# EAGLE board PCB v17 (EAGLE 9.7.0)
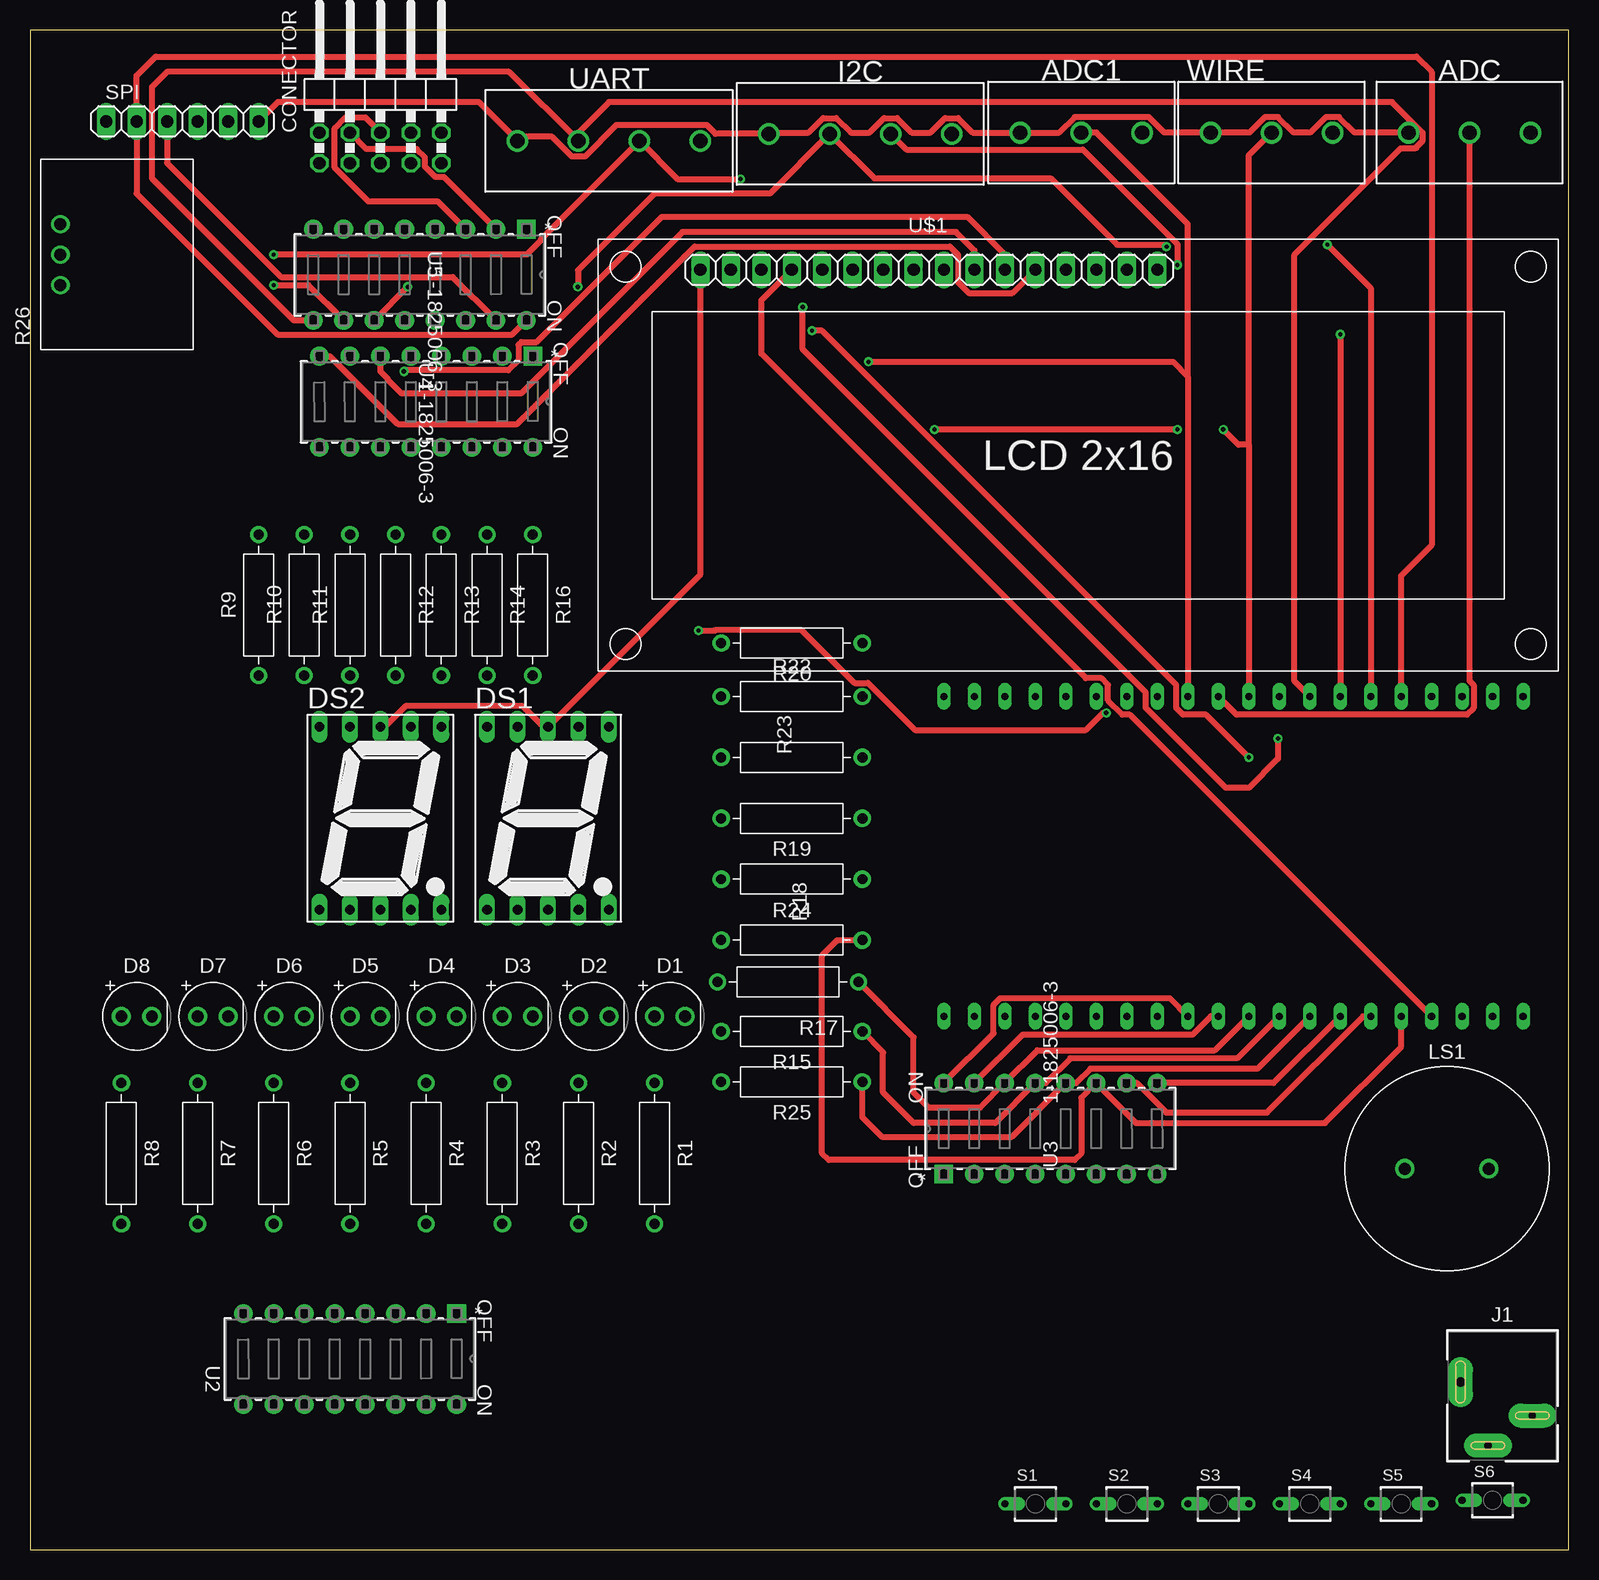
[diagram p0: board, top side]
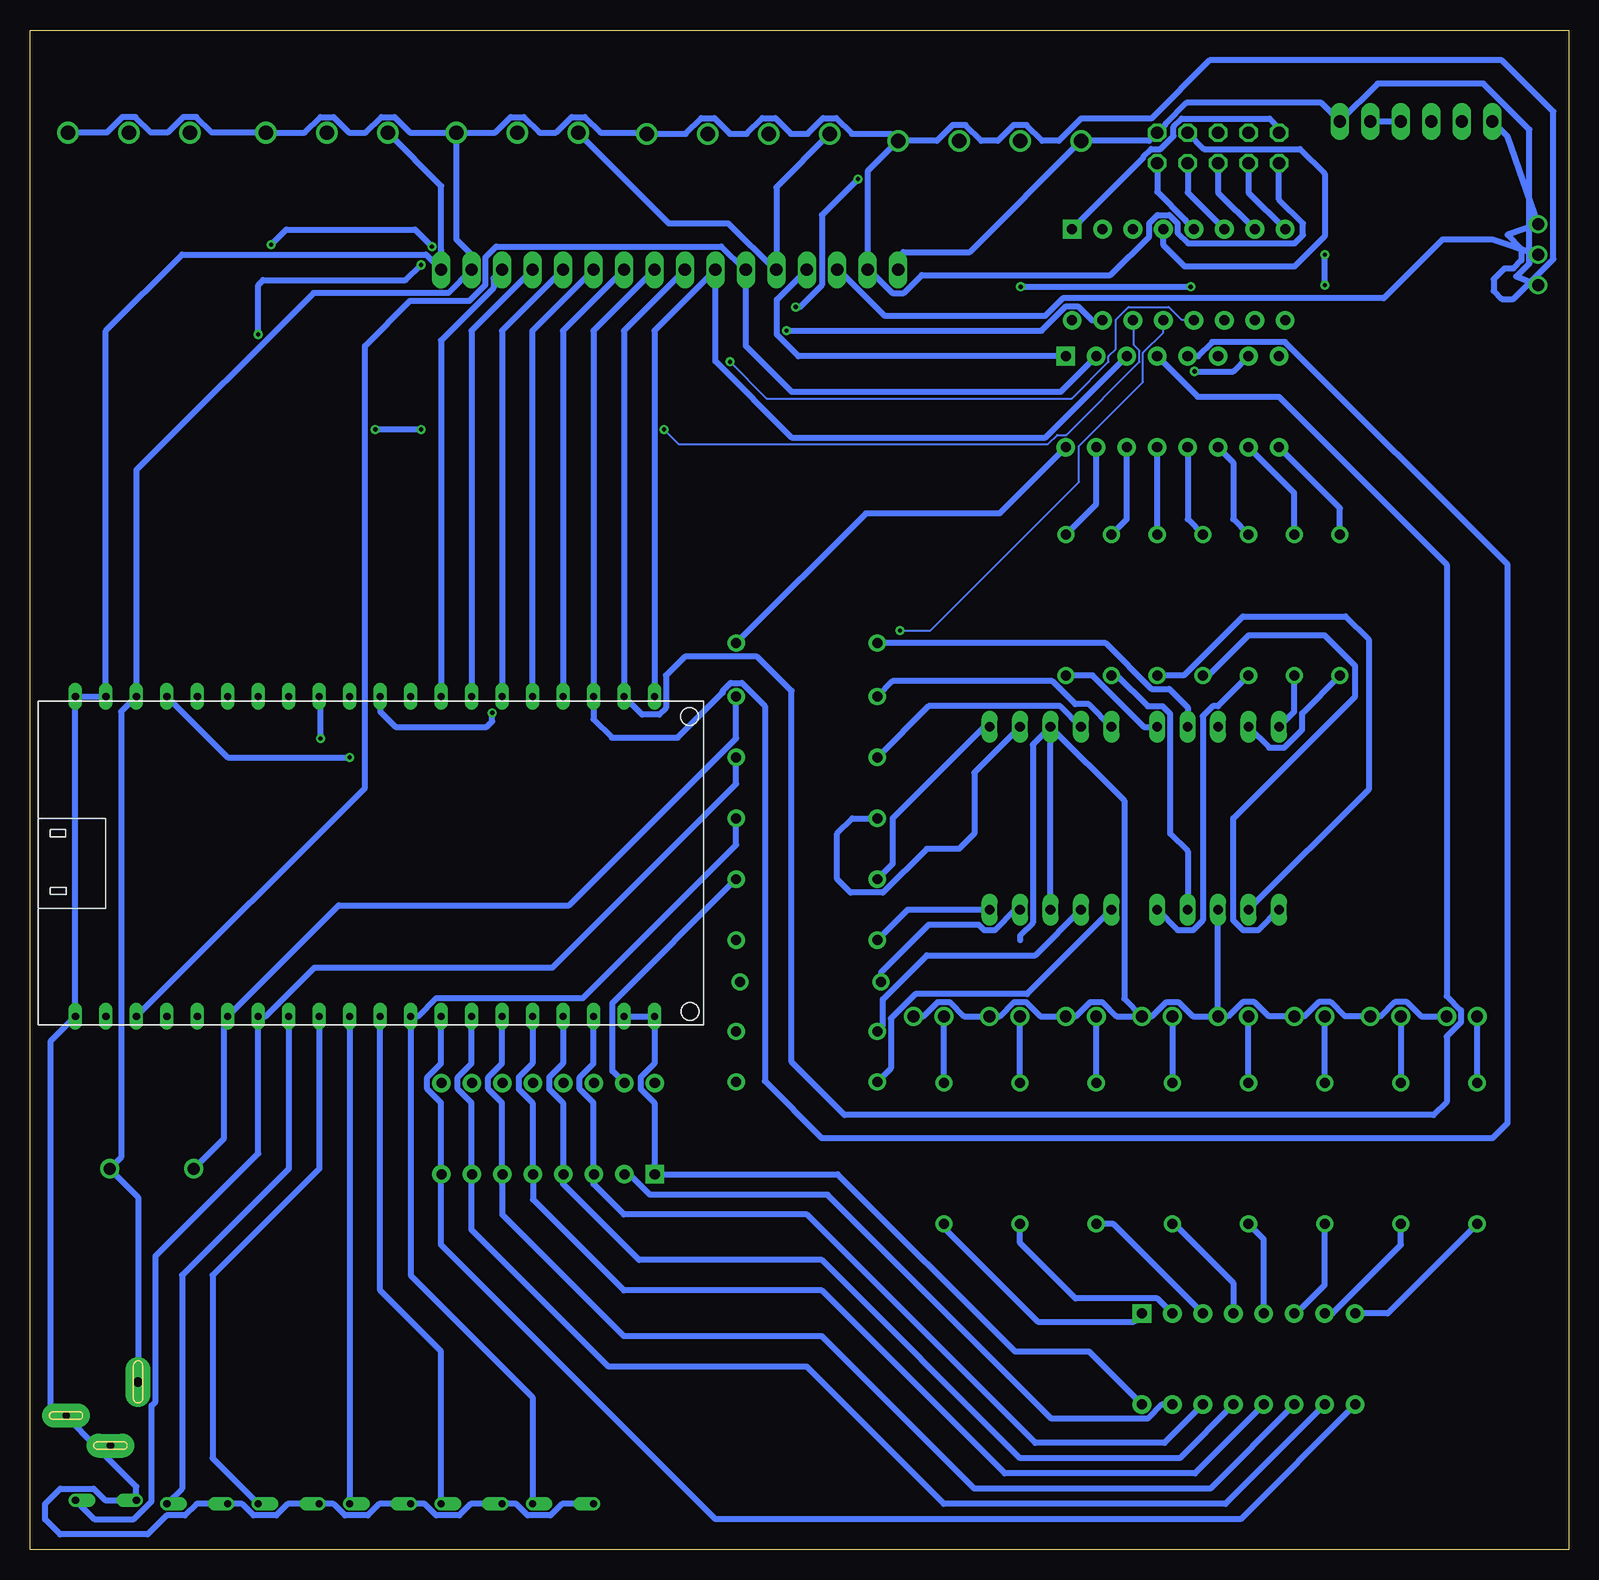
[diagram p1: board, bottom side, seen from below]

Size 128.25 x 126.67 mm. Coordinates in mm from the lower left corner, seen from the top.
Outline: 120.43,8.37 120.41,8.37 120.38,8.38 120.36,8.38 120.33,8.39 120.31,8.4 120.28,8.41 120.26,8.42 120.24,8.44 120.22,8.46 120.2,8.48 120.19,8.5 120.17,8.52 120.16,8.54 120.15,8.57 120.14,8.59 120.14,8.62 120.13,8.64 120.13,8.67 120.13,8.7 120.14,8.72 120.14,8.75 120.15,8.77 120.16,8.8 120.17,8.82 120.19,8.84 120.2,8.86 120.22,8.88 120.24,8.9 120.26,8.92 120.28,8.93 120.31,8.94 120.33,8.95 120.36,8.96 120.38,8.96 120.41,8.97 120.43,8.97 122.63,8.97 122.66,8.97 122.69,8.96 122.71,8.96 122.74,8.95 122.76,8.94 122.78,8.93 122.81,8.92 122.83,8.9 122.85,8.88 122.86,8.86 122.88,8.84 122.89,8.82 122.91,8.8 122.92,8.77 122.92,8.75 122.93,8.72 122.93,8.7 122.93,8.67 122.93,8.64 122.93,8.62 122.92,8.59 122.92,8.57 122.91,8.54 122.89,8.52 122.88,8.5 122.86,8.48 122.85,8.46 122.83,8.44 122.81,8.42 122.78,8.41 122.76,8.4 122.74,8.39 122.71,8.38 122.69,8.38 122.66,8.37 122.63,8.37 120.43,8.37
Outline: 118.83,12.62 118.83,15.32 118.84,15.36 118.84,15.39 118.85,15.42 118.86,15.46 118.87,15.49 118.89,15.52 118.91,15.55 118.93,15.58 118.95,15.6 118.98,15.63 119,15.65 119.03,15.67 119.06,15.68 119.1,15.7 119.13,15.71 119.16,15.71 119.2,15.72 119.23,15.72 119.27,15.72 119.3,15.71 119.34,15.71 119.37,15.7 119.4,15.68 119.43,15.67 119.46,15.65 119.49,15.63 119.52,15.6 119.54,15.58 119.56,15.55 119.58,15.52 119.6,15.49 119.61,15.46 119.62,15.42 119.63,15.39 119.63,15.36 119.63,15.32 119.63,12.62 119.63,12.59 119.63,12.55 119.62,12.52 119.61,12.48 119.6,12.45 119.58,12.42 119.56,12.39 119.54,12.36 119.52,12.34 119.49,12.31 119.46,12.29 119.43,12.27 119.4,12.26 119.37,12.24 119.34,12.23 119.3,12.23 119.27,12.22 119.23,12.22 119.2,12.22 119.16,12.23 119.13,12.23 119.1,12.24 119.06,12.26 119.03,12.27 119,12.29 118.98,12.31 118.95,12.34 118.93,12.36 118.91,12.39 118.89,12.42 118.87,12.45 118.86,12.48 118.85,12.52 118.84,12.55 118.84,12.59 118.83,12.62
Outline: 124.13,10.87 124.11,10.87 124.08,10.88 124.06,10.88 124.03,10.89 124.01,10.9 123.98,10.91 123.96,10.92 123.94,10.94 123.92,10.96 123.9,10.98 123.89,11 123.87,11.02 123.86,11.04 123.85,11.07 123.84,11.09 123.84,11.12 123.83,11.14 123.83,11.17 123.83,11.2 123.84,11.22 123.84,11.25 123.85,11.27 123.86,11.3 123.87,11.32 123.89,11.34 123.9,11.36 123.92,11.38 123.94,11.4 123.96,11.42 123.98,11.43 124.01,11.44 124.03,11.45 124.06,11.46 124.08,11.46 124.11,11.47 124.13,11.47 126.33,11.47 126.36,11.47 126.39,11.46 126.41,11.46 126.44,11.45 126.46,11.44 126.48,11.43 126.51,11.42 126.53,11.4 126.55,11.38 126.56,11.36 126.58,11.34 126.59,11.32 126.61,11.3 126.62,11.27 126.62,11.25 126.63,11.22 126.63,11.2 126.63,11.17 126.63,11.14 126.63,11.12 126.62,11.09 126.62,11.07 126.61,11.04 126.59,11.02 126.58,11 126.56,10.98 126.55,10.96 126.53,10.94 126.51,10.92 126.48,10.91 126.46,10.9 126.44,10.89 126.41,10.88 126.39,10.88 126.36,10.87 126.33,10.87 124.13,10.87
Outline: 0,126.67 0,0 128.25,0 128.25,126.67 0,126.67
Copper layers (1*16): Top / Bottom
Stack-up Default Layer Stack: Top User Defined 0.035mm / Dielectric-1 User Defined 1.5mm / Bottom User Defined 0.035mm
Design rules "default": minimum track width 6mil, minimum drill 0.35mm, track to track 6mil, track to pad 6mil, pad to pad 6mil, via to via 6mil, smd to smd 6mil, copper to edge 40mil, drill to drill 6mil, minimum pad ring 10mil, minimum via ring 8mil, stop-mask expansion 4mil, vias tented up to drill 0mil, thermal gap 10mil

## Footprints (pad centres in the part's own frame; a part is rotated, then mirrored left to right if it is on the bottom)
TERMBLK_508-3N = drill 1.2: 1 0,0; 2 5.08,0; 3 10.16,0
2X05/90 = drill 1.016 octagon: 1 -5.08,-6.35; 2 -5.08,-3.81; 3 -2.54,-6.35; 4 -2.54,-3.81; 5 0,-6.35; 6 0,-3.81; 7 2.54,-6.35; 8 2.54,-3.81; 9 5.08,-6.35; 10 5.08,-3.81
LEDRD254W60D565H860B_G = drill 0.981 pad 1.581: 1 -1.27,0; 2 1.27,0
7SEG-13 = drill 0.813 long: 1 -5.08,-7.62; 2 -2.54,-7.62; 3 0,-7.62; 4 2.54,-7.62; 5 5.08,-7.62; 6 5.08,7.62; 7 2.54,7.62; 8 0,7.62; 9 -2.54,7.62; 10 -5.08,7.62
TERMBLK_508-4N = drill 1.2: 1 0,0; 2 5.08,0; 3 10.16,0; 4 15.24,0
694106402002 = drill 0.8 pad 2.1 long: 1 -3.5,0 | drill 0.6 pad 2 long: 2 -1.2,-5.3; 3 2.5,-2.8
PIEZO = drill 1 pad 1.6: 1 -3.5,0; 2 3.5,0
RESAD1176W63L850D250B = drill 0.83 pad 1.43: 1 -5.88,0; 2 5.88,0
91A1A-B28-B15L-ND = drill 1: 1 2.54,0; 2 0,0; 3 -2.54,0
SWITCH-OMRON_B3U-1000P = drill 0.6 offset: P$1 -2.54,0; P$3 2.54,0
1X06 = drill 1.016 long: 1 -6.35,0; 2 -3.81,0; 3 -1.27,0; 4 1.27,0; 5 3.81,0; 6 6.35,0
FRANZININHO = drill 0.6 long: 1 2.54,52.07; 2 2.54,49.53; 3 2.54,46.99; 4 2.54,44.45; 5 2.54,41.91; 6 2.54,39.37; 7 2.54,36.83; 8 2.54,34.29; 9 2.54,31.75; 10 2.54,29.21; 11 2.54,26.67; 12 2.54,24.13; 13 2.54,21.59; 14 2.54,19.05; 15 2.54,16.51; 16 2.54,13.97; 17 2.54,11.43; 18 2.54,8.89; 19 2.54,6.35; 20 2.54,3.81; 21 29.21,52.07; 22 29.21,49.53; 23 29.21,46.99; 24 29.21,44.45; 25 29.21,41.91; 26 29.21,39.37; 27 29.21,36.83; 28 29.21,34.29; 29 29.21,31.75; 30 29.21,29.21; 31 29.21,26.67; 32 29.21,24.13; 33 29.21,21.59; 34 29.21,19.05; 35 29.21,16.51; 36 29.21,13.97; 37 29.21,11.43; 38 29.21,8.89; 39 29.21,6.35; 40 29.21,3.81
SWDIP16_299X110P100 = drill 0.838 pad 1.549 square: 1 -7.595,17.78 | drill 0.838 pad 1.549: 2 -7.595,15.24; 3 -7.595,12.7; 4 -7.595,10.16; 5 -7.595,7.62; 6 -7.595,5.08; 7 -7.595,2.54; 8 -7.595,0; 9 0,0; 10 0,2.54; 11 0,5.08; 12 0,7.62; 13 0,10.16; 14 0,12.7; 15 0,15.24; 16 0,17.78
JHD-162A = drill 1.016 long: 1 -19.05,0; 2 -16.51,0; 3 -13.97,0; 4 -11.43,0; 5 -8.89,0; 6 -6.35,0; 7 -3.81,0; 8 -1.27,0; 9 1.27,0; 10 3.81,0; 11 6.35,0; 12 8.89,0; 13 11.43,0; 14 13.97,0; 15 16.51,0; 16 19.05,0

## Placement (x,y rotation side)
ADC  2828XX-3282837-3  [TERMBLK_508-3N]  125.08,118.11 180 top
ADC1  2828XX-3282837-3  [TERMBLK_508-3N]  92.71,118.11 180 top
CONECTOR  PINHD-2X5/90  [2X05/90]  29.21,121.92 0 top
D1  [LEDRD254W60D565H860B_G]  53.34,44.45 0 top
D2  [LEDRD254W60D565H860B_G]  46.99,44.45 0 top
D3  [LEDRD254W60D565H860B_G]  40.64,44.45 0 top
D4  [LEDRD254W60D565H860B_G]  34.29,44.45 0 top
D5  [LEDRD254W60D565H860B_G]  27.94,44.45 0 top
D6  [LEDRD254W60D565H860B_G]  21.59,44.45 0 top
D7  [LEDRD254W60D565H860B_G]  15.24,44.45 0 top
D8  [LEDRD254W60D565H860B_G]  8.89,44.45 0 top
DS1  7SEG-CA  [7SEG-13]  43.18,60.96 0 top
DS2  7SEG-CA  [7SEG-13]  29.21,60.96 0 top
I2C  2828XX-4282837-4  [TERMBLK_508-4N]  76.82,118.02 180 top
J1  [694106402002]  122.73,13.97 0 top
LS1  PIEZO  [PIEZO]  118.11,31.75 0 top
R1  1k  [RESAD1176W63L850D250B]  52.07,33.02 270 top
R2  1k  [RESAD1176W63L850D250B]  45.72,33.02 270 top
R3  1k  [RESAD1176W63L850D250B]  39.37,33.02 270 top
R4  1k  [RESAD1176W63L850D250B]  33.02,33.02 270 top
R5  1k  [RESAD1176W63L850D250B]  26.67,33.02 270 top
R6  1k  [RESAD1176W63L850D250B]  20.32,33.02 270 top
R7  1k  [RESAD1176W63L850D250B]  13.97,33.02 270 top
R8  1k  [RESAD1176W63L850D250B]  7.62,33.02 270 top
R9  20  [RESAD1176W63L850D250B]  19.05,78.74 90 top
R10  20  [RESAD1176W63L850D250B]  22.86,78.74 90 top
R11  20  [RESAD1176W63L850D250B]  26.67,78.74 90 top
R12  20  [RESAD1176W63L850D250B]  30.48,78.74 270 top
R13  20  [RESAD1176W63L850D250B]  34.29,78.74 270 top
R14  20  [RESAD1176W63L850D250B]  38.1,78.74 270 top
R15  20  [RESAD1176W63L850D250B]  63.5,43.18 180 top
R16  20  [RESAD1176W63L850D250B]  41.91,78.74 270 top
R17  20  [RESAD1176W63L850D250B]  63.18,47.31 180 top
R18  20  [RESAD1176W63L850D250B]  63.5,55.88 180 top
R19  20  [RESAD1176W63L850D250B]  63.5,60.96 180 top
R20  20  [RESAD1176W63L850D250B]  63.5,75.56 180 top
R22  20  [RESAD1176W63L850D250B]  63.5,71.12 0 top
R23  20  [RESAD1176W63L850D250B]  63.5,66.04 0 top
R24  20  [RESAD1176W63L850D250B]  63.5,50.8 0 top
R25  20  [RESAD1176W63L850D250B]  63.5,38.98 180 top
R26  91A1A-B28-B15L  [91A1A-B28-B15L-ND]  2.54,107.95 90 top
S1  SWITCH-OMRON_B3U-1000P  [SWITCH-OMRON_B3U-1000P]  83.82,3.81 0 top
S2  SWITCH-OMRON_B3U-1000P  [SWITCH-OMRON_B3U-1000P]  91.44,3.81 0 top
S3  SWITCH-OMRON_B3U-1000P  [SWITCH-OMRON_B3U-1000P]  99.06,3.81 0 top
S4  SWITCH-OMRON_B3U-1000P  [SWITCH-OMRON_B3U-1000P]  106.68,3.81 0 top
S5  SWITCH-OMRON_B3U-1000P  [SWITCH-OMRON_B3U-1000P]  114.3,3.81 0 top
S6  SWITCH-OMRON_B3U-1000P  [SWITCH-OMRON_B3U-1000P]  121.92,4.11 0 top
SPI  PINHD-1X06_1X06M  [1X06]  12.7,119.05 0 top
U1  FRANZININHO  [FRANZININHO]  128.27,41.91 90 top
U2  1-1825006-3  [SWDIP16_299X110P100]  17.78,12.09 270 top
U3  1-1825006-3  [SWDIP16_299X110P100]  93.95,38.89 90 top
U4  1-1825006-3  [SWDIP16_299X110P100]  24.13,91.88 270 top
U5  1-1825006-3  [SWDIP16_299X110P100]  23.61,102.47 270 top
U$1  LCD-16X2JHD-162A  [JHD-162A]  74.93,106.68 0 top
UART  2828XX-4282837-4  [TERMBLK_508-4N]  55.88,117.43 180 top
WIRE  2828XX-3282837-3  [TERMBLK_508-3N]  108.57,118.11 180 top

## Library data of the parts
ADC ADC1 WIRE = Connector; CATEGORY: Connector; DESCRIPTION: TERM BLK 3P SIDE ENT 5.08mm PCB; MANUFACTURER: TE Connectivity; MPN: 282837-3; OPERATING_TEMPERATURE: -40°C to +105°C; PART_STATUS: Active; ROHS_COMPLIANCE: RoHS Compliant; SERIES: 282837; SUBCATEGORY: Terminal Block; TYPE: Side Wire Entry
CONECTOR = Connector; CATEGORY: CONNECTOR; SUB-CATEGORY: PIN-HEADER
D1-D8 = Library
DS1 DS2 = Opto-Electronic; CATEGORY: Opto-Electronic; SUB-CATEGORY: Display; TYPE: 7-Segment
I2C UART = Connector; CATEGORY: Connector; DESCRIPTION: TERM BLK 4P SIDE ENT 5.08mm PCB; MANUFACTURER: TE Connectivity; MPN: 282837-4; OPERATING_TEMPERATURE: 40°C to +105°C; PART_STATUS: Active; ROHS_COMPLIANCE: RoHS Compliant; SERIES: 283737; SUBCATEGORY: Terminal Block; TYPE: Side Wire Entry
J1 = Connector; CATEGORY: Connector; DESCRIPTION: DC POWER JACK - VERTICAL - THT - 2.0 & 2.5Ø - WR-DC; MANUFACTURER: Würth Elektronik; MPN: 694106402002; OPERATING_TEMPERATURE: -40°C to +85°C; PART_STATUS: Active; ROHS_COMPLIANCE: RoHS Compliant; SERIES: WR-DC; SUBCATEGORY: Power Connector; TYPE: Vertical
LS1 SPI U$1 = Tinkercad
R1-R20 R22-R25 = Resistor; CATEGORY: Resistor; SUB-CATEGORY: Fixed
R26 = Potentiometer_Trimmers; CREATED_BY: PCBLayout.com; DIGIKEY_PARTNO: 91A1A-B28-B15L-ND; MANUFACTURER: Bourns Inc.; MPN: 91A1A-B28-B15L
S1-S6 = 52101-101-REV-A_v16
U1 = LIB Franzininho; PROD_ID: IC-13338
U2-U5 = Switches; BUILT_BY: EMA_UL_Team; CATEGORY: DIP & SIP Switches; COPYRIGHT: Copyright (C) 2016 Accelerated Designs. All rights reserved; DESCRIPTION: GDS0804=DIP SW,SLIDE,THRU/HL; MANUFACTURER_PART_NUMBER: 1-1825006-3; PART_STATUS: active; SERIES: Alcoswitch DIP,Alcoswitch DIP GDS; VENDOR: TE Connectivity

## Nets
3V3: U1.19
+5V: ADC1.1 ADC.1 CONECTOR.1 I2C.1 J1.1 LS1.2 R26.1 SPI.1 U1.38 U$1.2 U$1.15 UART.1 WIRE.1
GND: ADC1.3 ADC.3 CONECTOR.10 D1.2 D2.2 D3.2 D4.2 D5.2 D6.2 D7.2 D8.2 DS1.3 DS1.8 DS2.3 DS2.8 I2C.4 J1.2 J1.3 R26.3 S1.P$1 S2.P$1 S3.P$1 S4.P$1 S5.P$1 S6.P$1 SPI.6 U1.20 U1.39 U1.40 U$1.1 U$1.5 U$1.16 UART.4 WIRE.3
GPIO: SPI.4 SPI.5
GPIO0: U1.1 U1.2 U2.16 U3.1
GPIO1: U2.15 U3.2
GPIO2: U1.3 U2.14 U3.3
GPIO3: U1.4 U2.13 U3.4
GPIO4: U1.5 U2.12 U3.5
GPIO5: U1.6 U2.11 U3.6
GPIO6: U1.7 U2.10 U3.7
GPIO7: U1.8 U2.9 U3.8
GPIO8: U1.17 U4.1 U$1.4
GPIO9: U1.18 U4.2 U$1.6
GPIO10: R19.1 S1.P$3 U1.9 U3.16
GPIO11: R18.1 S2.P$3 U1.10 U3.15
GPIO12: R17.1 S3.P$3 U1.11 U3.14
GPIO13: R15.1 S4.P$3 U1.12 U3.13
GPIO14: R25.1 S5.P$3 U1.13 U3.12
GPIO15: R23.2 S6.P$3 U1.14 U3.9
GPIO16: LS1.1 R22.2 U1.15 U3.10
GPIO17: R24.2 U1.16 U3.11
GPIO18: SPI.3 U1.37 U5.15
GPIO21: SPI.2 U1.36 U5.16
GPIO26: I2C.3 U1.35 U5.11
GPIO33: I2C.2 U1.34
GPIO34: U1.33 U5.9 UART.3
GPIO35: U1.32 U5.10 UART.2
GPIO36: U1.31 U5.14 WIRE.2
GPIO37: ADC.2 U1.30 U5.13
GPIO38: ADC1.2 U1.29 U5.12
GPIO39: U1.28 U$1.14
GPIO40: U1.27 U$1.13
GPIO41: U1.26 U4.8 U$1.12
GPIO42: U1.25 U4.7 U$1.11
GPIO43: U1.24 U4.6 U$1.10
GPIO44: U1.23 U4.5 U$1.9
GPIO45: U1.22 U4.4 U$1.8
GPIO46: U1.21 U4.3 U$1.7
N$1: D1.1 R1.1
N$2: D2.1 R2.1
N$3: D3.1 R3.1
N$4: D4.1 R4.1
N$5: D5.1 R5.1
N$6: D6.1 R6.1
N$7: D7.1 R7.1
N$8: D8.1 R8.1
N$9: DS2.7 R20.2
N$10: DS2.6 R16.2
N$11: DS2.4 R14.2
N$12: DS2.2 R13.2
N$13: DS2.1 R12.2
N$14: DS2.9 R9.1
N$15: DS2.10 R10.1
N$16: DS1.1 R25.2
N$17: DS1.2 R15.2
N$18: DS1.4 R17.2
N$19: DS1.6 R18.2
N$20: DS1.7 R19.2
N$21: DS1.10 R22.1
N$22: DS1.9 R23.1
N$23: DS1.5 R24.1
N$24: R26.2 U$1.3
N$25: R1.2 U2.1
N$26: R5.2 U2.5
N$27: R6.2 U2.6
N$28: R7.2 U2.7
N$29: R8.2 U2.8
N$30: R4.2 U2.4
N$31: R3.2 U2.3
N$32: R2.2 U2.2
N$33: DS2.5 R11.1
N$34: R20.1 U4.16
N$35: R16.1 U4.15
N$36: R14.1 U4.14
N$37: R13.1 U4.13
N$38: R12.1 U4.12
N$39: R11.2 U4.11
N$40: R10.2 U4.10
N$41: R9.2 U4.9
N$49: CONECTOR.3 U5.8
N$50: CONECTOR.5 U5.7
N$51: CONECTOR.7 U5.6
N$52: CONECTOR.9 U5.5
N$53: CONECTOR.2 U5.1
N$54: CONECTOR.4 U5.2
N$55: CONECTOR.6 U5.3
N$56: CONECTOR.8 U5.4

## Tracks (layer width: path | path; a pad name or v marks a point on that pad's centre or on a via)
+5V
  Bottom 0.508: J1.1 119.23,29.37 LS1.2 120.65,32.71 120.65,69.85 U1.38 119.38,89.99 104.62,104.75 93.37,104.75 U$1.15 91.44,107.95 92.71,109.22 ADC1.1 | SPI.1 5.08,117.78 R26.1 5.08,109.59 3.92,108.43 3.92,107.47 4.6,106.79 5.34,106.79 6.24,105.89 6.24,104.93 5.56,104.25 4.6,104.25 1.27,107.58 1.27,119.86 5.54,124.13 29.92,124.13 34.77,119.28 40.64,119.28 42.49,117.43 43.87,117.43 45.18,118.73 46.26,118.73 47.57,117.43 48.95,117.43 50.26,118.73 51.34,118.73 52.65,117.43 UART.1 | ADC.1 121.85,118.11 120.54,119.42 119.46,119.42 118.16,118.11 116.77,118.11 115.47,119.42 114.38,119.42 113.08,118.11 WIRE.1 105.34,118.11 104.03,119.42 102.95,119.42 101.65,118.11 100.26,118.11 98.95,119.42 97.87,119.42 96.57,118.11 ADC1.1 | ADC1.1 89.48,118.11 88.17,119.42 87.09,119.42 85.78,118.11 84.4,118.11 83.09,119.42 82.01,119.42 80.7,118.11 76.92,118.11 I2C.1 73.59,118.02 72.28,119.32 71.2,119.32 69.9,118.02 68.51,118.02 67.2,119.32 66.12,119.32 64.82,118.02 63.43,118.02 62.12,119.32 61.04,119.32 59.74,118.02 56.47,118.02 UART.1 | UART.1 58.42,114.89 U$1.2 58.29,106.68 56.36,104.75 55.4,104.75 53.91,106.24 38.17,106.24 34.95,109.46 34.95,110.55 34.26,111.24 33.28,111.24 32.59,110.55 32.59,109.75 31.72,108.88 22.83,108.88 22.14,109.57 22.14,110.55 24.13,112.55 CONECTOR.1
GND
  Top 0.508: DS2.8 29.58,68.58 31.31,70.31 41.08,70.31 42.81,68.58 DS1.8 55.88,81.28 U$1.1 | UART.4 40.3,117.77 | 40.3,117.77 37.42,120.65 20.65,120.65 SPI.6 | ADC.3 110.42,118.11 109.11,119.42 108.03,119.42 106.73,118.11 105.34,118.11 104.03,119.42 102.95,119.42 101.65,118.11 WIRE.3 94.56,118.11 93.25,119.42 87.09,119.42 85.78,118.11 ADC1.3 78.58,118.11 77.37,119.32 76.28,119.32 75.07,118.11 73.5,118.11 72.28,119.32 71.2,119.32 69.99,118.11 68.42,118.11 67.2,119.32 66.12,119.32 64.91,118.11 61.68,118.11 I2C.4 57.14,118.02 56.42,118.73 48.87,118.73 46.26,116.12 45.18,116.12 43.53,117.77 40.3,117.77
  Bottom 0.152: 125.14,11 125.22,10.92 J1.3
  Bottom 0.508: D4.2 34.71,44.45 33.52,45.65 32.52,45.65 31.33,44.45 D5.2 | D5.2 28.36,44.45 27.17,45.65 26.17,45.65 24.98,44.45 D6.2 22.01,44.45 20.82,45.65 19.82,45.65 18.63,44.45 D7.2 15.66,44.45 14.47,45.65 13.47,45.65 12.28,44.45 D8.2 | D1.2 53.76,44.45 52.57,45.65 51.57,45.65 50.38,44.45 D2.2 47.41,44.45 46.22,45.65 45.22,45.65 44.03,44.45 D3.2 41.06,44.45 39.87,45.65 38.87,45.65 37.68,44.45 D4.2 | 122.8,8.67 125.14,11 125.3,11.17 | J1.3 126.5,11.17 126.5,42.41 U1.20 U1.40 U1.39 121.92,101.6 115.57,107.95 95.25,107.95 U$1.16 93.98,108.27 93.96,108.29 93.96,113.66 WIRE.3 | D5.2 DS2.3 | I2C.4 66.04,113.56 U$1.5 66.17,106.68 70.03,110.54 74.98,110.54 ADC1.3 | J1.2 122.8,8.67 | 122.8,8.67 119.38,5.25 S6.P$1 121.99,4.11 122.95,5.07 125.72,5.07 126.98,3.81 126.98,2.52 125.73,1.27 118.45,1.27 116.87,2.85 115.33,2.85 114.37,3.81 S5.P$1 110.58,3.81 109.62,2.85 107.71,2.85 106.75,3.81 S4.P$1 102.96,3.81 102,2.85 100.09,2.85 99.13,3.81 S3.P$1 95.34,3.81 94.38,2.85 92.47,2.85 91.51,3.81 S2.P$1 87.72,3.81 86.76,2.85 84.85,2.85 83.89,3.81 S1.P$1 | D4.2 37.03,45.92 37.03,62.43 DS1.8 | R26.3 4.36,106.13 4.33,106.13 3.26,107.2 3.26,118.37 7.08,122.2 15.9,122.2 SPI.6 20.6,120.6 31.85,120.6 33.58,118.87 33.58,118.82 CONECTOR.10 34.97,117.43 UART.4 49.9,108.17 55.45,108.17 55.88,107.74 U$1.1 | 45.72,50.8 45.72,51.17 44.65,52.24 44.65,67.11 DS1.8 | DS1.3 DS1.8
GPIO
  Bottom 0.508: SPI.5 SPI.4
GPIO0
  Bottom 0.508: U1.2 U1.1 76.2,40.52 77.35,39.38 77.35,38.4 76.2,37.25 76.2,31.33 U3.1 60.92,31.29 46.14,16.51 39.98,16.51 U2.16
GPIO1
  Bottom 0.508: U2.15 33.89,12.09 35.07,10.91 43.09,10.91 61.75,29.58 76.58,29.58 78.29,31.29 U3.2
GPIO2
  Bottom 0.508: U2.14 33.68,8.89 44.45,8.89 63.5,27.94 78.74,27.94 81.28,30.48 81.28,31.26 | 81.28,31.26 U3.3 | U1.3 81.28,40.52 82.43,39.38 82.43,38.4 81.28,37.25 81.28,31.26
GPIO3
  Bottom 0.508: U2.13 32.41,7.62 45.72,7.62 62.23,24.13 77.47,24.13 83.78,30.44 83.78,30.48 | 83.78,30.48 U3.4 | 83.78,30.48 83.82,30.51 83.82,37.25 84.97,38.4 84.97,39.38 83.82,40.52 U1.4
GPIO4
  Bottom 0.508: U2.12 31.14,6.35 46.99,6.35 62.23,21.59 78.74,21.59 86.32,29.18 U3.5 86.36,31.33 86.36,37.25 87.51,38.4 87.51,39.38 86.36,40.52 U1.5
GPIO5
  Bottom 0.508: U2.11 29.87,5.08 49.53,5.08 62.23,17.78 78.74,17.78 88.87,27.9 88.87,30.48 | 88.87,30.48 U3.6 | 88.87,30.48 88.9,30.51 88.9,37.25 90.05,38.4 90.05,39.38 88.9,40.52 U1.6
GPIO6
  Bottom 0.508: U2.10 28.6,3.81 52.07,3.81 63.5,15.24 80.01,15.24 91.44,26.67 91.44,31.26 U3.7 91.44,31.33 91.44,37.25 92.59,38.4 92.59,39.38 91.44,40.52 U1.7
GPIO7
  Bottom 0.508: U2.9 27.33,2.54 71.12,2.54 93.98,25.4 93.98,31.26 | 93.98,31.26 U3.8 | U1.8 93.98,40.52 95.13,39.38 95.13,38.4 93.98,37.25 93.98,31.26
GPIO8
  Top 0.508: U$1.4 60.96,104.14 60.96,99.69 88.01,72.63 89.3,72.63 89.86,72.07 89.86,70.79 91.04,69.61 91.68,69.61 U1.17
  Bottom 0.508: U4.1 64.19,99.48 65.98,101.28 65.98,104.2 U$1.4
GPIO9
  Bottom 0.508: U4.2 42.33,96.52 64.77,96.52 68.58,100.33 U$1.6 68.71,106.68 70.64,108.61 89.38,108.61 90.27,107.72 90.27,105.43 91.62,104.09 96.57,104.09 100.33,100.33 100.33,63.5 U1.18
GPIO10
  Top 0.508: U3.16 80.32,43.04 80.32,45.4 80.88,45.96 95.01,45.96 U1.9
  Bottom 0.508: S1.P$3 86.36,12.7 96.52,22.86 U1.9 95.89,44.45 94.38,45.96 82.15,45.96 69.38,58.74 R19.1
GPIO11
  Top 0.508: U1.10 98.43,44.45 96.92,42.94 82.75,42.94 U3.15
  Bottom 0.508: S2.P$3 93.98,16.51 99.06,21.59 U1.10 | R18.1 79.7,45.56 79.7,39.88 U3.15
GPIO12
  Top 0.508: R17.1 73.66,42.71 73.66,38.1 74.93,36.83 79.19,36.83 U3.14 83.97,41.61 98.76,41.61 U1.11
  Bottom 0.508: U1.11 S3.P$3
GPIO13
  Top 0.508: R15.1 71.12,41.44 71.12,38.1 73.66,35.56 80.46,35.56 U3.13 84.66,38.89 86.72,40.95 100.64,40.95 U1.12
  Bottom 0.508: U1.12 104.14,31.75 113.03,22.86 113.03,7.62 S4.P$3
GPIO14
  Top 0.508: R25.1 69.38,36.03 71.01,34.4 81.84,34.4 U3.12 87.19,38.89 88.38,40.07 102.3,40.07 U1.13
  Bottom 0.508: U1.13 106.68,31.75 115.57,22.86 115.57,5.08 S5.P$3
GPIO15
  Top 0.508: U3.9 103.66,38.89 U1.14
  Bottom 0.508: R23.2 69.38,63.82 84.69,48.5 104.54,48.5 108.59,44.45 U1.14 109.22,33.02 117.78,24.46 117.78,12.32 118.11,11.98 118.11,4.02 119.59,2.54 122.89,2.54 S6.P$3
GPIO16
  Top 0.508: U1.15 111.13,44.45 103.12,36.44 94.73,36.44 92.28,38.89 U3.10
  Bottom 0.508: LS1.1 112.07,34.29 112.07,44.14 U1.15 102.5,53.7 83.3,53.7 69.38,67.63 R22.2
GPIO17
  Top 0.508: U1.16 114.3,41.91 107.95,35.56 92.19,35.56 U3.11 87.63,37.65 87.63,33.02 87.08,32.47 66.59,32.47 66.04,33.02 66.04,49.53 67.31,50.8 R24.2
GPIO18  (via drill 0.35)
  Top 0.508: SPI.3 11.43,115.57 20.93,106.07 35.25,106.07 U5.15 | v101.6,66.04 98.03,69.61 96.12,69.61 95.56,70.17 95.56,72.08 66.04,101.6 v65.2,101.6
  Bottom 0.508: U1.37 111.76,66.04 v101.6,66.04 | U5.15 39.72,102.47 40.9,103.65 41.88,103.65 43.93,101.6 v65.2,101.6
GPIO21
  Top 0.152: 114.4,71.12 U1.36 | SPI.2 8.94,119.1
  Top 0.508: U5.16 40.21,101.29 20.63,101.29 8.89,113.03 SPI.2 8.89,122.86 10.49,124.46 115.57,124.46 116.84,123.19 116.84,83.72 114.3,81.18 U1.36
GPIO26  (via drill 0.35)
  Top 0.152: 111.66,71.12 U1.35 | 66.7,117.91 I2C.3 66.55,117.91 | 28.75,102.51 U5.11
  Top 0.508: v94.75,108.61 94.6,108.76 90.63,108.76 85.09,114.3 70.38,114.3 I2C.3 61.68,113.03 52.07,113.03 45.67,106.63 v45.67,105.26 | v31.5,105.26 28.75,102.51 | v108.15,108.76 111.76,105.16 U1.35
  Bottom 0.508: v45.67,105.26 v31.5,105.26 | v108.15,108.76 106.88,110.03 96.16,110.03 v94.75,108.61
GPIO33  (via drill 0.35)
  Top 0.152: 71.88,117.91 I2C.2
  Top 0.508: v95.66,107.09 95.66,108.81 87.76,116.71 73.05,116.71 I2C.2 | v109.22,101.3 U1.34
  Bottom 0.508: v109.22,101.3 109.22,105.41 108.81,105.82 96.93,105.82 v95.66,107.09
GPIO34
  Top 0.152: 116.08,117.6 116.08,118.11 | 106.78,71.12 U1.33 | UART.3 45.82,117.6
  Top 0.508: U5.9 21.99,102.47 10.16,114.3 10.16,121.92 11.43,123.19 39.96,123.19 UART.3 45.72,118.11 48.26,120.65 113.54,120.65 116.08,118.11 116.08,117.42 115.5,116.84 | U1.33 105.41,72.39 105.41,107.95 114.26,116.8 115.47,116.8 115.5,116.84 | 115.5,116.84 115.57,116.84
GPIO35  (via drill 0.35)
  Top 0.152: v64.41,103.58 64.11,103.28 | UART.2 51,117.3
  Top 0.508: v20.32,107.95 41.4,107.95 42.57,109.12 42.57,109.2 UART.2 53.98,114.25 v59.23,114.25 | v20.32,105.41 23.21,105.41 U5.10 | v104.04,67.62 104.04,65.94 101.6,63.5 99.69,63.5 93.02,70.17 93.02,71.45 64.41,100.06 v64.41,103.58
  Bottom 0.508: v20.32,105.41 v20.32,107.95 | v104.04,67.62 104.04,71.02 U1.32 | v59.23,114.25 62.23,111.25 62.23,105.41 64.06,103.58 v64.41,103.58
GPIO36  (via drill 0.35)
  Top 0.508: WIRE.2 101.6,116.22 101.6,92.1 | 101.6,92.1 U1.31 | 101.6,92.1 100.74,92.1 v99.47,93.37 | v95.66,93.37 v75.39,93.37
  Bottom 0.152: v75.39,93.37 74.17,92.15 43.38,92.15 42.62,92.91 41.86,92.91 35.76,99.01 35.76,99.92 36.22,100.38 36.22,102.36 U5.14
  Bottom 0.508: v95.66,93.37 v99.47,93.37
GPIO37  (via drill 0.35)
  Top 0.508: ADC.2 120,72.41 120.34,72.07 120.34,70.17 119.78,69.61 100.57,69.61 U1.30 | v55.73,76.61 57.08,76.61 57.15,76.68 64.29,76.68 68.73,72.24 69.84,72.24 73.75,68.34 88.03,68.34 89.44,69.75 v89.71,69.75
  Bottom 0.152: v55.73,76.61 53.19,76.61 40.79,89 40.79,92 35.46,97.33 35.46,99.77 33.78,101.45 33.78,102.36 U5.13 | 99.01,71.12 U1.30
  Bottom 0.508: U1.30 99.06,69.85 97.79,68.58 90.17,68.58 89.71,69.04 v89.71,69.75
GPIO38  (via drill 0.35)
  Top 0.508: ADC1.2 88.9,118.11 96.52,110.49 96.52,97.79 | 96.52,97.79 U1.29 | v69.9,99.01 95.3,99.01 96.52,97.79
  Bottom 0.152: v69.9,99.01 66.85,95.96 41.4,95.96 38.35,99.01 38.35,99.47 37.74,100.08 37.74,102.51 36.68,103.58 33.32,103.58 32.26,102.51 31.34,102.51 U5.12
GPIO39
  Bottom 0.508: U$1.14 89.61,105.97 89.61,105.16 93.98,100.79 U1.28
GPIO40
  Bottom 0.508: U$1.13 91.44,101.6 U1.27
GPIO41
  Top 0.508: U4.8 25,99.48 30.65,93.83 40.61,93.83 55.4,108.61 76.68,108.61 77.37,107.93 77.37,105.64 78.26,104.75 81.89,104.75 U$1.12
  Bottom 0.508: U$1.12 88.9,101.6 U1.26
GPIO42  (via drill 0.35)
  Top 0.508: U$1.11 81.28,107.95 78.13,111.1 52.68,111.1 42.24,100.66 40.97,100.66 40.73,100.42 40.73,99.17 39.86,98.3 31.26,98.3 v31.17,98.21
  Bottom 0.508: U$1.11 86.36,101.6 U1.25 | v31.17,98.21 27.94,98.21 U4.7
GPIO43
  Top 0.508: U$1.10 78.74,108.29 77.2,109.83 54.38,109.83 40.92,96.37 30.97,96.37 29.82,97.52 29.82,97.6 29.21,98.21 U4.6
  Bottom 0.508: U$1.10 83.82,101.6 U1.24
GPIO44
  Bottom 0.508: U$1.9 81.28,101.6 U1.23 81.28,69.21 79.75,67.67 74.26,67.67 70.5,71.43 70.5,71.59 69.84,72.24 68.92,72.24 66.99,70.31 66.99,39.05 62.23,34.29 6.35,34.29 5.08,35.56 5.08,82.1 23.64,100.66 29.7,100.66 30.88,99.48 U4.5
GPIO45
  Bottom 0.508: U$1.8 78.74,101.6 U1.22 77.23,69.61 75.8,69.61 75.24,70.17 75.24,72.86 73.66,74.44 67.64,74.44 64.77,71.57 64.77,40.64 60.35,36.22 11.25,36.22 10.16,37.31 10.16,42.76 8.96,43.95 8.96,44.95 10.16,46.14 10.16,82.12 24.13,96.09 30.9,96.09 U4.4
GPIO46
  Bottom 0.508: U1.21 76.2,101.6 U$1.7 71.12,99.06 64.77,92.71 43.6,92.71 U4.3
N$1
  Bottom 0.508: R1.1 D1.1
N$2
  Bottom 0.508: R2.1 D2.1
N$3
  Bottom 0.508: R3.1 D3.1
N$4
  Bottom 0.508: D4.1 R4.1
N$5
  Bottom 0.508: R5.1 D5.1
N$6
  Bottom 0.508: R6.1 D6.1
N$7
  Bottom 0.508: D7.1 R7.1
N$8
  Bottom 0.508: R8.1 D8.1
N$9
  Bottom 0.508: R20.2 38.58,75.56 34.76,71.74 33.28,71.74 31.75,70.21 DS2.7
N$10
  Bottom 0.508: R16.2 39.69,72.86 35.41,68.58 DS2.6
N$11
  Bottom 0.508: R14.2 37.64,72.86 35.08,70.31 33.85,70.31 33.22,69.68 33.22,59.69 31.75,58.22 DS2.4
N$12
  Bottom 0.508: R13.2 32.07,72.86 27.13,77.79 18.58,77.79 16.66,75.87 16.66,63.35 DS2.2
N$13
  Bottom 0.508: R12.2 30.01,72.86 26.67,76.2 20.32,76.2 17.78,73.66 17.78,71.12 27.94,60.96 27.94,52.44 27.11,51.61 25.86,51.61 DS2.1
N$14
  Bottom 0.508: R9.1 22.2,69.71 22.2,68.34 23.69,66.85 24.94,66.85 DS2.9
N$15
  Bottom 0.508: DS2.10 22.86,69.85 R10.1
N$16
  Bottom 0.508: DS1.1 45.13,46.31 54.45,46.31 56.49,44.26 56.49,40.11 R25.2
N$17
  Bottom 0.508: R15.2 57.15,43.65 57.15,45.87 53.49,49.53 44.45,49.53 DS1.2
N$18
  Bottom 0.508: DS1.4 46.09,53.34 47.82,51.61 48.7,51.61 49.16,52.07 53.34,52.07 57.3,48.11 R17.2
N$19
  Bottom 0.508: DS1.6 48.73,68.58 56.35,60.96 56.35,57.15 R18.2
N$20
  Bottom 0.508: DS1.7 49.53,64.77 49.53,59.69 50.8,58.42 53.49,58.42 57.15,54.76 59.84,54.76 60.96,55.88 60.96,59.69 59.69,60.96 R19.2
N$21
  Bottom 0.508: R22.1 56.35,72.39 43.03,72.39 41.1,70.47 39.99,70.47 DS1.10
N$22
  Bottom 0.508: R23.1 53.35,70.31 42.37,70.31 DS1.9
N$23
  Bottom 0.508: R24.1 55.08,53.34 DS1.5
N$24
  Bottom 0.508: U$1.3 60.83,106.68 56.97,102.82 43.64,102.82 42.15,104.31 15.41,104.31 10.5,109.22 6.35,109.22 R26.2
N$25
  Bottom 0.508: R1.2 52.07,26.82 44.24,19 36.25,19 U2.1
N$26
  Bottom 0.508: U2.5 25.4,25.87 R5.2
N$27
  Bottom 0.508: U2.6 22.69,19.69 20.32,22.06 R6.2
N$28
  Bottom 0.508: R7.2 13.97,25.4 19.68,19.69 U2.7
N$29
  Bottom 0.508: R8.2 15.07,19.69 U2.8
N$30
  Bottom 0.508: U2.4 27.94,22.23 32.85,27.14 R4.2
N$31
  Bottom 0.508: R3.2 37.93,27.14 U2.3
N$32
  Bottom 0.508: U2.2 34.26,20.93 41.09,20.93 45.72,25.55 R2.2
N$33
  Bottom 0.508: R11.1 29.22,70.31 29.65,70.31 30.48,69.48 30.48,52.44 31.31,51.61 32.56,51.61 DS2.5
N$34
  Bottom 0.508: R20.1 58.58,86.36 47.43,86.36 U4.16
N$35
  Bottom 0.508: R16.1 39.37,87.16 U4.15
N$36
  Bottom 0.508: R14.1 36.83,85.89 U4.14
N$37
  Bottom 0.508: R13.1 U4.13
N$38
  Bottom 0.508: U4.12 31.75,85.89 R12.1
N$39
  Bottom 0.508: R11.2 27.94,85.89 27.94,90.62 U4.11
N$40
  Bottom 0.508: R10.2 22.86,88.08 U4.10
N$41
  Bottom 0.508: R9.2 19.05,86.81 U4.9
N$49
  Bottom 0.508: U5.8 26.67,113.12 CONECTOR.3
N$50
  Bottom 0.508: U5.7 29.21,113.12 CONECTOR.5
N$51
  Bottom 0.508: U5.6 31.75,113.12 CONECTOR.7
N$52
  Bottom 0.508: U5.5 31.93,110.76 31.93,110.83 34.29,113.19 CONECTOR.9
N$53
  Bottom 0.508: CONECTOR.2 24.13,118.49 24.92,119.28 32.23,119.28 32.92,118.59 32.92,117.83 34.01,116.74 34.77,116.74 35.46,116.05 35.46,115.99 U5.1
N$54
  Top 0.508: U5.2 34.51,114.4 33.81,114.4 32.92,115.29 32.92,116.05 32.23,116.74 28.04,116.74 CONECTOR.4
N$55
  Top 0.508: CONECTOR.6 27.94,119.38 26.29,119.38 25.4,118.49 25.4,115.19 28.22,112.37 34,112.37 U5.3
N$56
  Bottom 0.508: CONECTOR.8 30.38,116.74 22.38,116.74 20.32,114.68 20.32,109.48 22.85,106.95 31.99,106.95 33.77,108.73 U5.4